# EAGLE board rnduino-backbone-v0.1 (EAGLE 7.1.0)
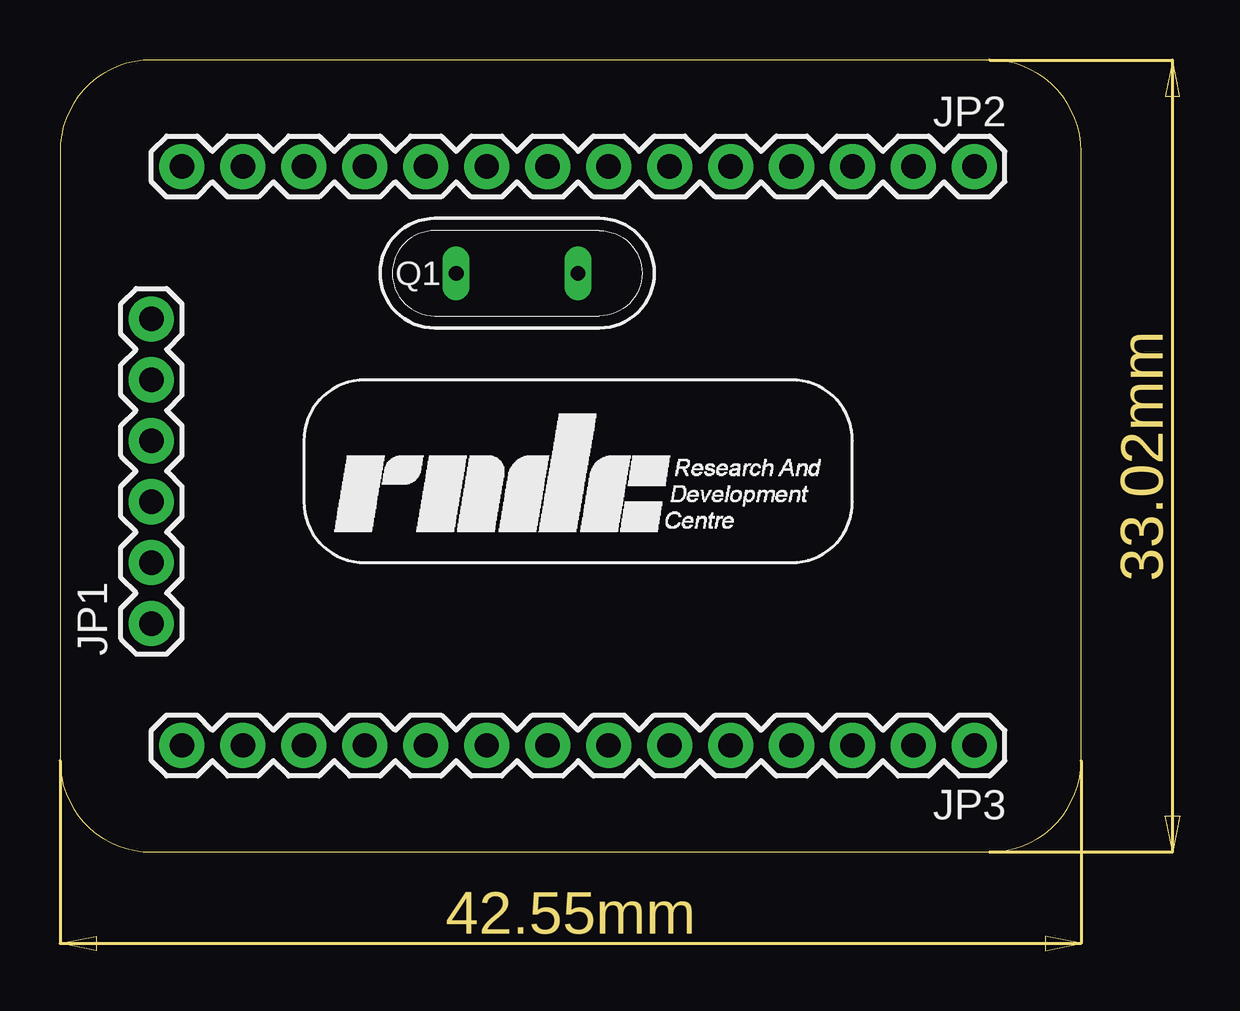
[diagram p0: board, top side]
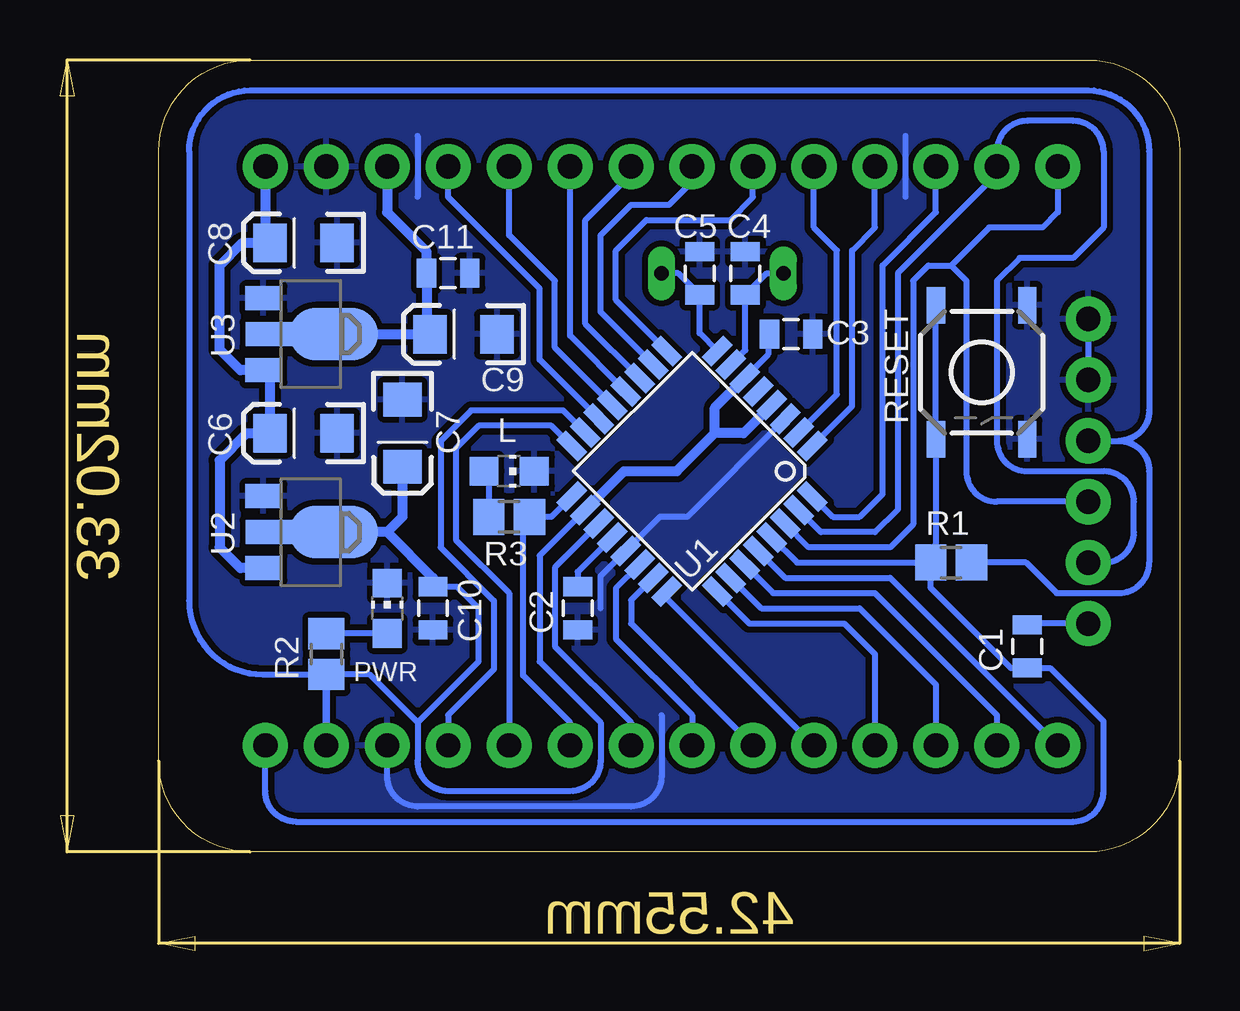
[diagram p1: board, bottom side, seen from below]

Size 42.55 x 33.02 mm. Coordinates in mm from the lower left corner, seen from the top.
Outline: 3.81,0 38.73,0 arc90 42.55,3.81 42.55,29.21 arc90 38.73,33.02 3.81,33.02 arc90 0,29.21 0,3.81 arc90 3.81,0
Copper layers (1*16): Top 0.035mm / dielectric 1.5mm / Bottom 0.035mm
Design rules "default": minimum track width 10mil, minimum drill 24mil, track to track 8mil, track to pad 8mil, pad to pad 8mil, via to via 8mil, smd to smd 8mil, copper to edge 40mil, drill to drill 8mil, minimum pad ring 10mil, minimum via ring 8mil, stop-mask expansion 4mil, vias tented up to drill 0mil, thermal gap 10mil

## Footprints (pad centres in the part's own frame; a part is rotated, then mirrored left to right if it is on the bottom)
SPARKFUN_0805 = smd 0.8 x 1.2: 1 -0.9,0; 2 0.9,0
SPARKFUN_EIA3216 = smd 1.4 x 1.6: A 1.4,0; C -1.4,0
SPARKFUN_1X06 = drill 1.016 pad 1.88: 1 0,0; 2 2.54,0; 3 5.08,0; 4 7.62,0; 5 10.16,0; 6 12.7,0
1X14 = drill 1.016 pad 1.88: 1 0,0; 2 2.54,0; 3 5.08,0; 4 7.62,0; 5 10.16,0; 6 12.7,0; 7 15.24,0; 8 17.78,0; 9 20.32,0; 10 22.86,0; 11 25.4,0; 12 27.94,0; 13 30.48,0; 14 33.02,0
CHIP-LED0805 = smd 1.2 x 1.2: A 0,-1.05; C 0,1.05
QS = drill 0.61 long: 1 -2.54,0; 2 2.54,0
R0805 = smd 1.3 x 1.5: 1 -0.85,0; 2 0.85,0
TESTING_TACTILE-SWITCH-SMD-ALT01 = smd 1.524 x 0.762: 1 -2.794,1.905; 2 2.794,1.905; 3 -2.794,-1.905; 4 2.794,-1.905
SPARKFUN_TQFP32-08 = smd 1.27 x 0.559: 1 -4.293,2.8; 2 -4.293,2; 3 -4.293,1.2; 4 -4.293,0.4; 5 -4.293,-0.4; 6 -4.293,-1.2; 7 -4.293,-2; 8 -4.293,-2.8; 17 4.293,-2.8; 18 4.293,-2; 19 4.293,-1.2; 20 4.293,-0.4; 21 4.293,0.4; 22 4.293,1.2; 23 4.293,2; 24 4.293,2.8 | smd 0.559 x 1.27: 9 -2.8,-4.293; 10 -2,-4.293; 11 -1.2,-4.293; 12 -0.4,-4.293; 13 0.4,-4.293; 14 1.2,-4.293; 15 2,-4.293; 16 2.8,-4.293; 25 2.8,4.293; 26 2,4.293; 27 1.2,4.293; 28 0.4,4.293; 29 -0.4,4.293; 30 -1.2,4.293; 31 -2,4.293; 32 -2.8,4.293
SOT89 = smd 1 x 1.5: 1 -1.499,-1.981; 3 1.499,-1.981 | smd 1 x 2: 2 0,-1.727 | smd 2.2 x 3.7: 2@1 0,0.94

## Placement (x,y rotation side)
C1  100nF  [SPARKFUN_0805]  6.35,8.57 90 bottom
C2  100nF  [SPARKFUN_0805]  25.08,10.16 90 bottom
C3  100nF  [SPARKFUN_0805]  16.19,21.59 180 bottom
C4  22pF  [SPARKFUN_0805]  18.1,24.13 270 bottom
C5  22pF  [SPARKFUN_0805]  20,24.13 270 bottom
C6  47uF  [SPARKFUN_EIA3216]  36.51,17.46 180 bottom
C7  47uF  [SPARKFUN_EIA3216]  32.38,17.46 270 bottom
C8  47uF  [SPARKFUN_EIA3216]  36.51,25.4 180 bottom
C9  47uF  [SPARKFUN_EIA3216]  29.84,21.59 180 bottom
C10  100nF  [SPARKFUN_0805]  31.11,10.16 90 bottom
C11  100nF  [SPARKFUN_0805]  30.48,24.13 180 bottom
JP1  FTDI Basic  [SPARKFUN_1X06]  3.81,9.53 90 top
JP2  M14  [1X14]  38.1,28.57 180 top
JP3  M14  [1X14]  38.1,4.45 180 top
L  [CHIP-LED0805]  27.94,15.88 270 bottom
PWR  [CHIP-LED0805]  33.02,10.16 0 bottom
Q1  16MHz  [QS]  19.05,24.13 0 top
R1  10k  [R0805]  9.53,12.06 0 bottom
R2  1k  [R0805]  35.56,8.26 270 bottom
R3  1k  [R0805]  27.94,13.97 0 bottom
RESET  Reset  [TESTING_TACTILE-SWITCH-SMD-ALT01]  8.26,20 270 bottom
U1  ATMEGA328  [SPARKFUN_TQFP32-08]  20.32,15.88 225 bottom
U2  AMS1117-5.0  [SOT89]  36.2,13.34 270 bottom
U3  AMS1117-3.3  [SOT89]  36.2,21.59 270 bottom
U$1  LOGO_RNDC_21  [RNDC_S]  10.16,12.06 0 top

## Library data of the parts
C1-C11 JP1 RESET U1 = Arduino-Pro-Mini
JP2 JP3 = SparkFun-Connectors
L PWR = led
Q1 = special
R1-R3 = resistor
U2 U3 = Itead_IC_110429
U$1 = Bona

## Nets
3.3V: C9.A C11.2 JP2.3 U3.2 U3.2@1
A0: JP3.9 U1.23
A1: JP3.10 U1.24
A2: JP3.11 U1.25
A3: JP3.12 U1.26
A4: JP3.13 U1.27
A5: JP3.14 U1.28
A6: JP3.7 U1.19
A7: JP3.8 U1.22
D0: JP1.3 JP2.14 U1.30
D1: JP1.2 JP2.13 U1.31
D2: JP2.12 U1.32
D3: JP2.11 U1.1
D4: JP2.10 U1.2
D5: JP2.9 U1.9
D6: JP2.8 U1.10
D7: JP2.7 U1.11
D8: JP2.6 U1.12
D9: JP2.5 U1.13
D10: JP2.4 U1.14
D11: JP3.4 U1.15
D12: JP3.5 U1.16
D13: JP3.6 R3.2 U1.17
DTR: C1.2 JP1.1
GND: C2.1 C3.1 C4.1 C5.1 C6.C C7.C C8.C C9.C C10.1 C11.1 JP1.5 JP1.6 JP2.2 JP3.3 L.C PWR.C RESET.1 RESET.2 U1.3 U1.5 U1.21 U2.1 U3.1
N$1: C2.2 U1.20
N$2: L.A R3.1
N$3: C4.2 Q1.1 U1.7
N$4: C5.2 Q1.2 U1.8
N$5: PWR.A R2.1
RST: C1.1 JP3.1 R1.1 RESET.3 RESET.4 U1.29
VCC: C3.2 C7.A C10.2 JP1.4 JP3.2 R1.2 R2.2 U1.4 U1.6 U1.18 U2.2 U2.2@1
VIN: C6.A C8.A JP2.1 U2.3 U3.3

## Tracks (layer width: path | path; a pad name or v marks a point on that pad's centre or on a via)
3.3V
  Bottom 0.406: U3.2 U3.2@1 C9.A 31.38,21.77 C11.2 31.38,25.03 33.02,26.67 JP2.3
A0
  Bottom 0.254: U1.23 22.86,10.51 22.86,9.53 JP3.9
A1
  Bottom 0.254: U1.24 21.38,10.58 JP3.10
A2
  Bottom 0.254: U1.25 17.93,9.53 13.97,9.53 12.7,8.26 JP3.11
A3
  Bottom 0.254: U1.26 17.43,10.16 13.34,10.16 10.16,6.99 JP3.12
A4
  Bottom 0.254: U1.27 16.94,10.79 12.7,10.79 7.62,5.71 JP3.13
A5
  Bottom 0.254: U1.28 16.44,11.43 12.06,11.43 JP3.14
A6
  Bottom 0.254: U1.19 26.04,11.86 26.04,8.57 22.86,5.4 JP3.7
A7
  Bottom 0.254: U1.22 23.5,11 23.5,8.89 20.32,5.71 JP3.8
D0
  Bottom 0.254: U1.30 15.45,12.7 12.06,12.7 11.11,13.65 11.11,23.81 10.48,24.45 9.53,24.45 | JP1.3 7.62,14.61 arc90 8.89,15.88 8.89,23.81 9.53,24.45 | JP2.14 5.08,26.67 5.71,26.04 7.94,26.04 9.53,24.45
D1
  Bottom 0.254: JP1.2 3.17,12.06 arc-90 1.91,13.34 1.91,14.61 arc-90 3.17,15.88 6.35,15.88 arc90 7.62,17.14 7.62,23.81 6.67,24.77 4.45,24.77 3.17,26.04 3.17,29.21 arc-90 4.45,30.48 6.35,30.48 arc-90 7.62,29.21 JP2.13 7.62,28.26 11.75,24.13 11.75,14.29 12.7,13.34 14.95,13.34 U1.31
D2
  Bottom 0.254: U1.32 14.46,13.97 13.34,13.97 12.38,14.92 12.38,24.45 10.16,26.67 JP2.12
D3
  Bottom 0.254: U1.1 13.65,18.58 13.65,25.08 12.7,26.04 JP2.11
D4
  Bottom 0.254: U1.2 14.29,19.08 14.29,25.08 15.24,26.04 JP2.10
D5
  Bottom 0.254: 21.52,20.89 U1.9 23.5,23.01 23.5,25.08 22.23,26.35 18.73,26.35 17.78,27.3 JP2.9
D6
  Bottom 0.254: U1.10 24.13,22.51 24.13,25.72 22.86,26.99 21.27,26.99 20.32,27.94 JP2.8
D7
  Bottom 0.254: U1.11 24.77,22.02 24.77,26.35 22.86,28.26 JP2.7
D8
  Bottom 0.254: U1.12 25.4,21.52 JP2.6
D9
  Bottom 0.254: U1.13 26.04,21.02 26.04,23.81 27.94,25.72 JP2.5
D10
  Bottom 0.254: U1.14 26.67,20.53 26.67,23.5 30.48,27.3 JP2.4
D11
  Bottom 0.254: U1.15 25.69,18.41 29.53,18.41 30.8,17.14 30.8,12.7 28.57,10.48 28.57,7.62 30.48,5.71 JP3.4
D12
  Bottom 0.254: JP3.5 27.94,10.79 30.16,13.02 30.16,16.83 29.21,17.78 26.18,17.78 U1.16
D13
  Bottom 0.254: JP3.6 25.4,5.4 27.36,7.36 27.36,14.29 R3.2 26.18,13.97 U1.17
DTR
  Bottom 0.254: JP1.1 6.3,9.53 C1.2
GND
  Bottom 0.254: U1.3 20.53,13.97 21.66,13.97 U1.21 24.13,11.5 24.13,10.16 | 21.59,5.71 21.59,3.17 arc90 22.86,1.91 31.75,1.91 arc90 33.02,3.17 JP3.3 | JP1.6 JP1.5 | C2.1 25.08,9.21 | 11.43,29.84 11.43,27.3 | 31.75,29.84 31.75,27.3
  pour Bottom (isolate 0.254): 3.81,0 38.73,0 arc90 42.55,3.81 42.55,29.21 arc90 38.73,33.02 3.81,33.02 arc90 0,29.21 0,3.81 arc90
N$1
  Bottom 0.254: U1.20 25.08,11.68 C2.2
N$2
  Bottom 0.254: L.A 28.52,15.88 28.79,15.61 R3.1
N$3
  Bottom 0.254: U1.7 18.1,20.93 C4.2 17.2,24.13 Q1.1
N$4
  Bottom 0.254: U1.8 20,21.63 C5.2 20.9,24.13 Q1.2
N$5
  Bottom 0.254: PWR.A 34.92,9.11 R2.1
RST
  Bottom 0.254: U1.29 15.94,12.06 R1.1 | RESET.3 RESET.4 10.16,12.91 R1.1 | JP3.1 38.1,2.54 arc-90 36.83,1.27 4.45,1.27 arc-90 3.17,2.54 3.17,5.45 5.4,7.67 C1.1 7.04,7.67 10.38,11.01 R1.1
VCC
  Bottom 0.254: JP1.4 2.54,17.14 | 2.54,17.14 arc90 1.27,15.88 1.27,12.06 arc90 2.54,10.79 5.13,10.79 6.4,12.06 R1.2 | U1.18 26.67,12.35 26.67,7.94 24.13,5.4 24.13,3.81 arc90 25.4,2.54 30.48,2.54 arc90 31.75,3.81 31.75,5.4 | 2.54,17.14 arc-90 1.27,18.41 1.27,29.21 arc-90 3.81,31.75 38.73,31.75 arc-90 41.27,29.21 41.27,10.48 arc-90 38.2,7.41 R2.2 33.76,7.41 31.75,5.4 | 31.75,5.4 29.21,7.94 29.21,10.16 30.11,11.06 C10.2 | C3.2 17.14,21.59 17.14,20.75 U1.6
  Bottom 0.305: JP3.2 R2.2
  Bottom 0.406: U2.2 U2.2@1 33.02,13.34 | C7.A 32.38,13.97 33.02,13.34 | 33.02,13.34 31.11,11.43 C10.2 | U1.4 18.17,17.46 19.37,17.46 | 19.37,17.46 19.37,18.52 U1.6 | 19.37,17.46 20.95,15.88 23.15,15.88 U1.18
VIN
  Bottom 0.406: U2.3 39.14,11.84 40.01,12.7 40.01,16.32 38.87,17.46 C6.A 37.91,19.83 U3.3 39.14,20.09 40.01,20.95 40.01,24.45 39.05,25.4 C8.A 38.1,25.59 JP2.1